# Altium PCB iman_tajik.PcbDoc
Units mm, origin at the board's own origin, x right, y up, seen from the top; angles counter-clockwise.
Board outline 105.93 x 71.25 mm, 2 copper layers (Top Layer, Bottom Layer); 28 components, 23 nets, 118 pads, 37 vias.
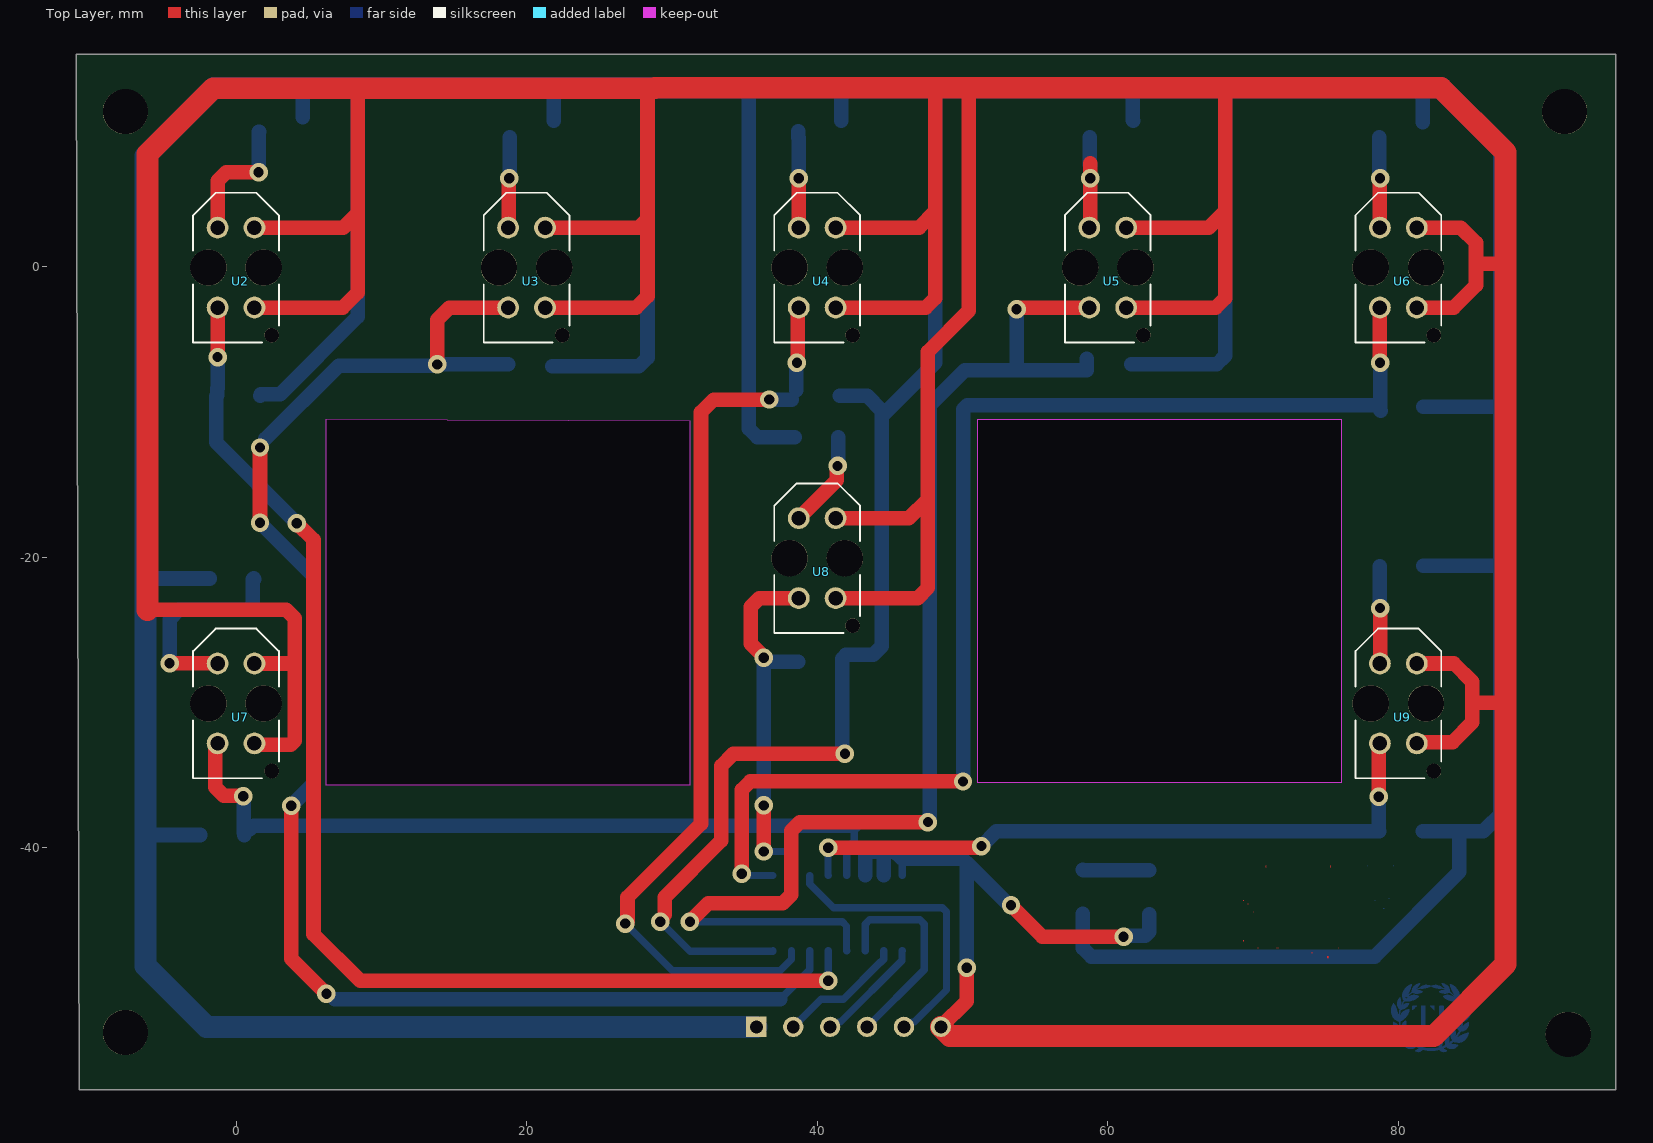
[diagram p0: Top Layer view]
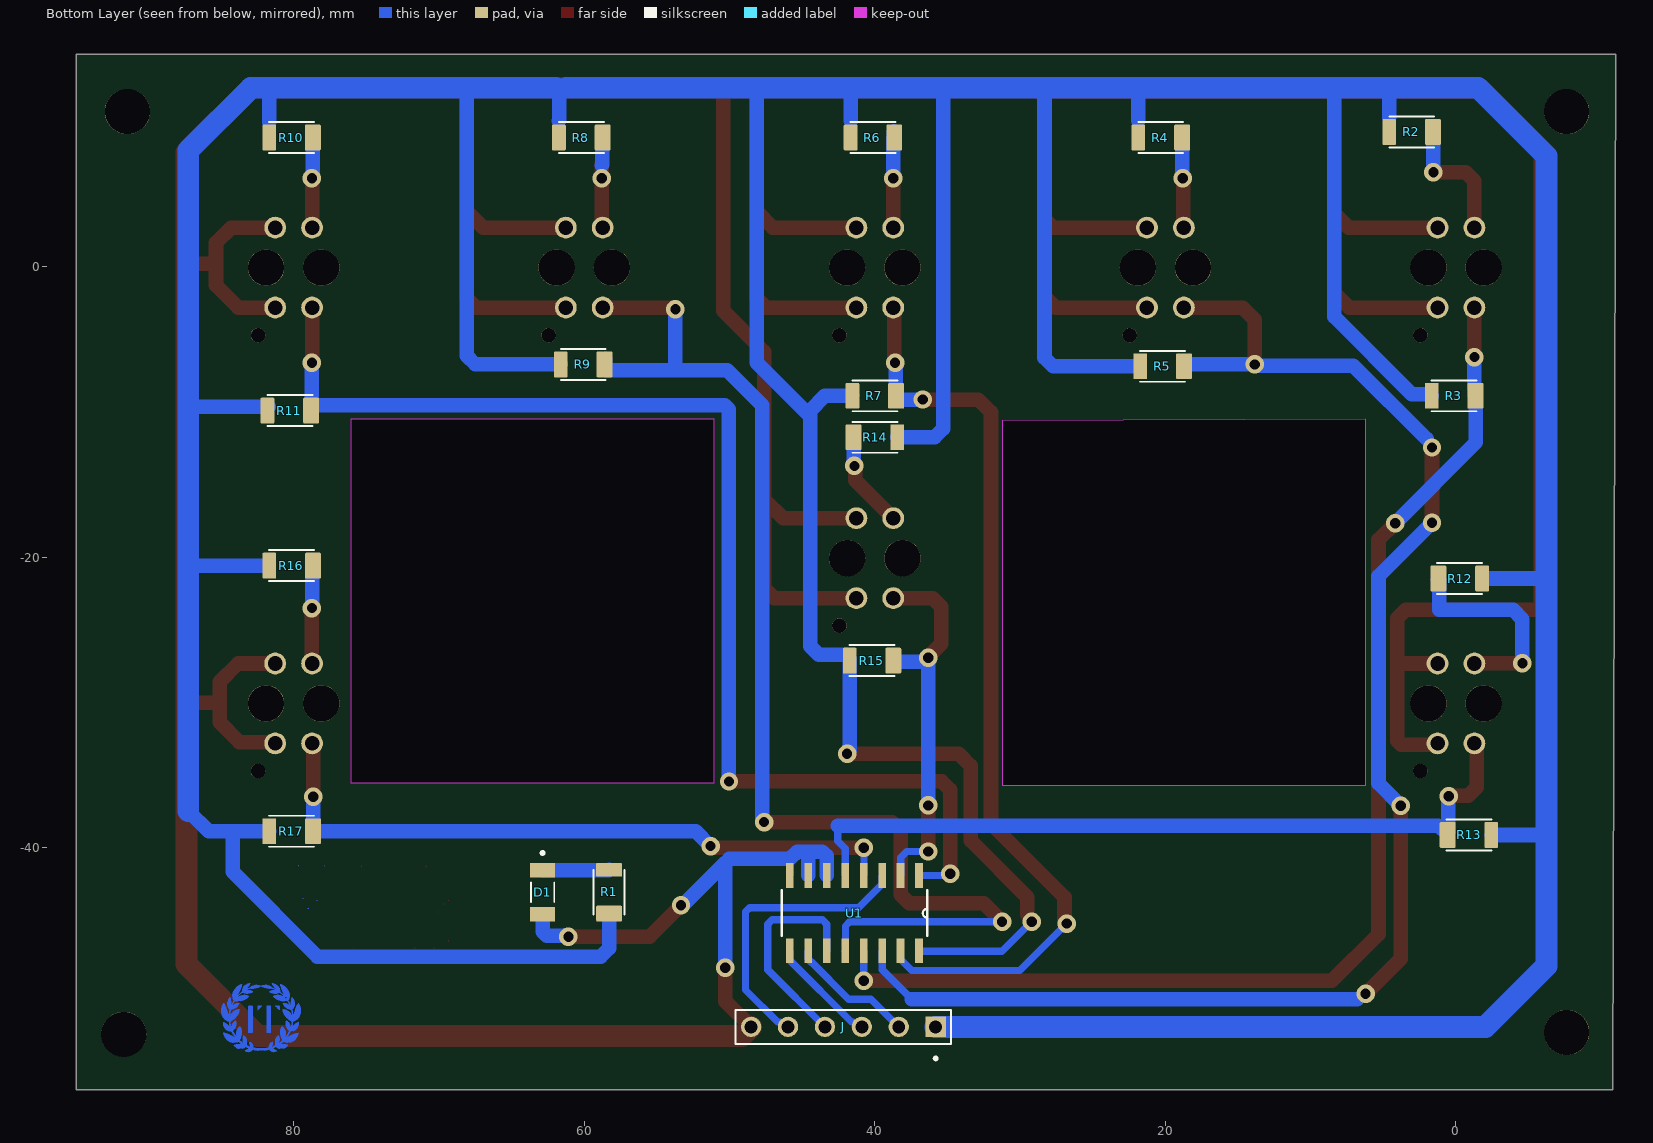
[diagram p1: Bottom Layer view, seen from below]
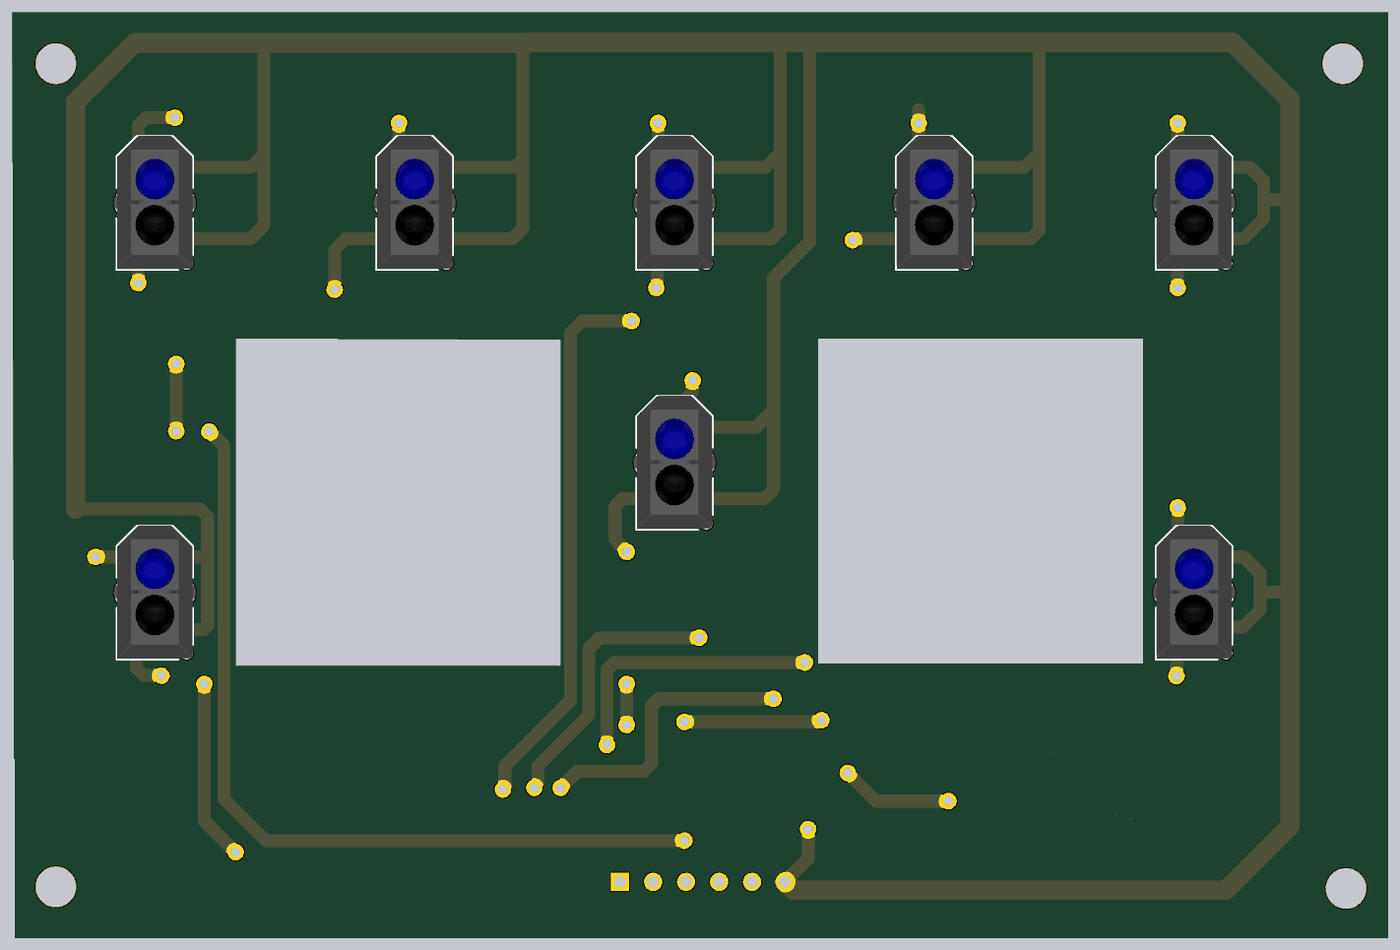
[diagram p2: 3D render of the assembled board from above, using the file's embedded part models]
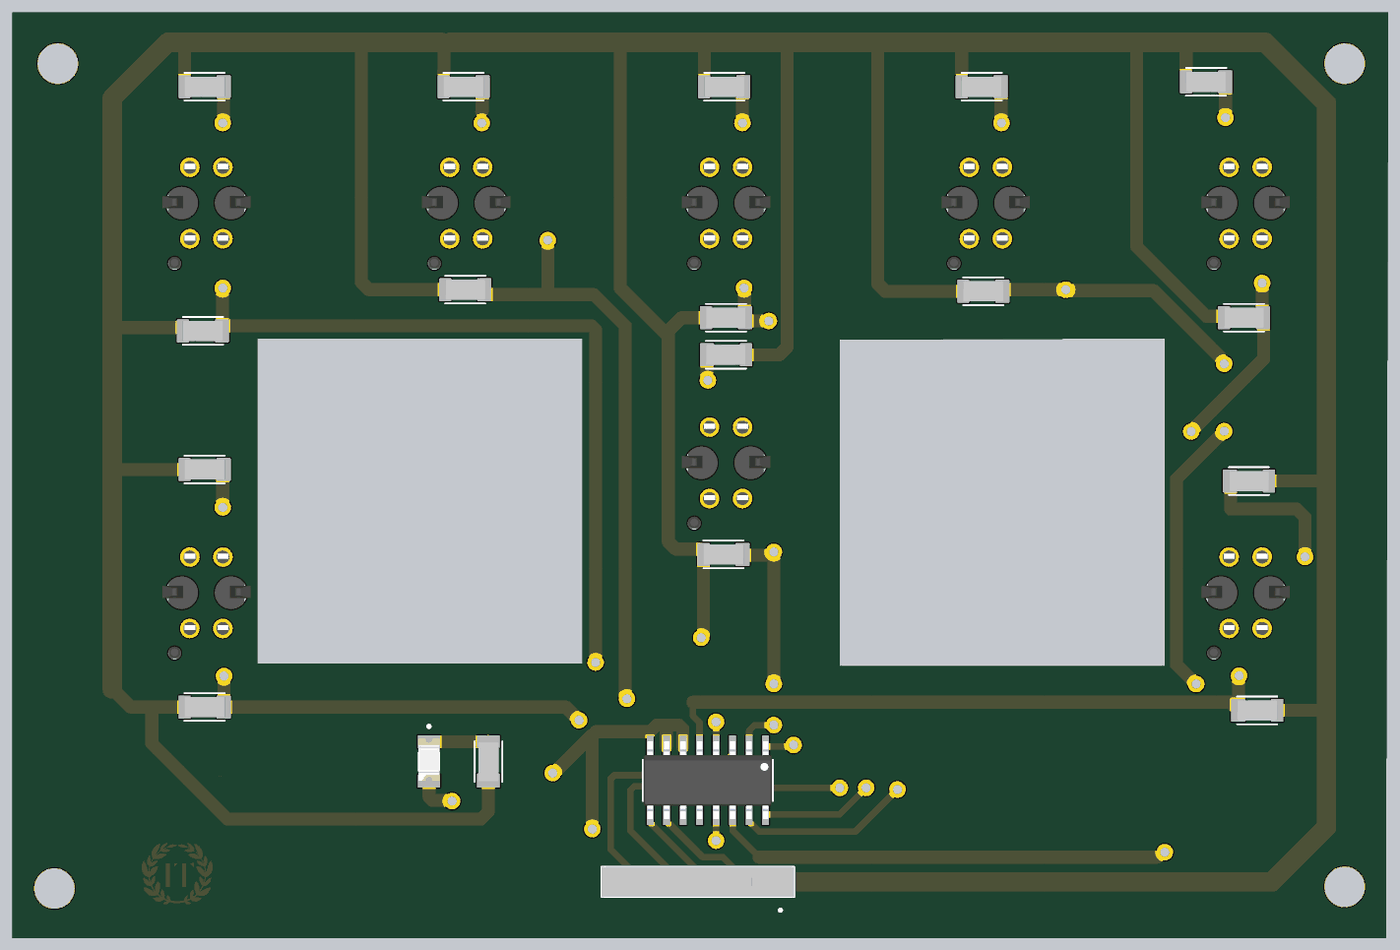
[diagram p3: 3D render of the assembled board from below, using the file's embedded part models]

## Layer stack, top to bottom
Top Solder: solder mask 0.0102, Solder Resist, Dk 3.5
Top Layer: signal copper 0.0356
Dielectric 1: dielectric 0.32, FR-4, Dk 4.8
Bottom Layer: signal copper 0.0356
Bottom Solder: solder mask 0.0102, Solder Resist, Dk 3.5

## Board outline
-10.805,-56.642 -10.981,14.605 94.948,14.605 94.948,-56.642
cut-out: 31.242,-10.593 31.242,-35.687 6.223,-35.687 6.223,-10.49
cut-out: 51.054,-35.509 51.054,-10.49 76.073,-10.49 76.073,-35.509

## Design rules (kind name [scope] priority, off if disabled: settings)
Clearance [All] p1: gap=0.254 ignorepadtopadclearanceinfootprint=FALSE except(0: Arc-Hole Track-Hole SMDPad-Hole THPad-Hole Via-Hole Fill-Hole Poly-Hole Region-Hole Text-Hole)
PolygonConnect [All] p1: connectstyle=Relief reliefconductorwidth=0.254 reliefentries=4 polygonreliefangle="90 Angle" airgapwidth=0.254
RoutingVias [All] p1: holewidth=0.711 width=1.27 viastyle="Through Hole" minholewidth=0.711 minwidth=1.27 maxholewidth=0.711 maxwidth=1.27
SolderMaskExpansion [All] p1: expansion=0.102 istentingtop=FALSE
Width [All] p1: maxlimit=1.5 minlimit=0.5 preferedwidth=1
30 further rules are at their usual default settings.

## Components (designator, comment, footprint, x,y, rotation, side; value= is the part's Value field where it differs from the comment)
D1 "LHN974_RED_LED_1206" LEDC3216X120N 62.865,-43.053 r270 bottom
J "103321-6" TE_103321-6 42.164,-52.324 r0 bottom
R1 "2-1879462-9" RESC3115X65N 58.293,-43.058 r90 bottom
R2 "2-1879462-9" RESC3115X65N 3.048,9.271 r0 bottom
R3 "2-1879462-9" RESC3115X65N 0.127,-8.89 r0 bottom
R4 "2-1879462-9" RESC3115X65N 20.32,8.89 r0 bottom
R5 "2-1879462-9" RESC3115X65N 20.193,-6.858 r0 bottom
R6 "2-1879462-9" RESC3115X65N 40.132,8.89 r0 bottom
R7 "2-1879462-9" RESC3115X65N 40,-8.89 r0 bottom
R8 "2-1879462-9" RESC3115X65N 60.198,8.89 r0 bottom
R9 "-1879462-9" RESC3115X65N 60.071,-6.731 r0 bottom
R10 "2-1879462-9" RESC3115X65N 80.137,8.89 r0 bottom
R11 "2-1879462-9" RESC3115X65N 80.264,-9.906 r0 bottom
R12 "2-1879462-9" RESC3115X65N -0.254,-21.463 r180 bottom
R13 "2-1879462-9" RESC3115X65N -0.889,-39.116 r180 bottom
R14 "2-1879462-9" RESC3115X65N 40,-11.747 r180 bottom
R15 "2-1879462-9" RESC3115X65N 40.191,-27.114 r0 bottom
R16 "2-1879462-9" RESC3115X65N 80.137,-20.574 r0 bottom
R17 "-1879462-9" RESC3115X65N 80.137,-38.862 r0 bottom
U1 "74HC4051D" SOIC127P600X175-16N 41.402,-44.501 r270 bottom
U2 "TCRT5000" OPTO_TCRT5000 0,-0.063 r90 top
U3 "TCRT5000" OPTO_TCRT5000 20,-0.063 r90 top
U4 "TCRT5000" OPTO_TCRT5000 40,-0.063 r90 top
U5 "TCRT5000" OPTO_TCRT5000 60,-0.063 r90 top
U6 "TCRT5000" OPTO_TCRT5000 80,-0.063 r90 top
U7 "TCRT5000" OPTO_TCRT5000 0,-30.063 r90 top
U8 "TCRT5000" OPTO_TCRT5000 40,-20.063 r90 top
U9 "TCRT5000" OPTO_TCRT5000 80,-30.063 r90 top

## Footprints (in the part's own frame and the unit in brackets; to place one, negate y for a bottom-side part, rotate by r counter-clockwise, add the part's x,y. Pads: shape width x height; smd on the part's side, far side on the other; paste and mask are expansions set on the pad)
LEDC3216X120N [mm]
  rect 1.01x1.73 smd: NEG(1.51,0) POS(-1.51,0)
  silkscreen extent -2.8,-0.8 0.69,0.8, body extent -1.73,-0.8 1.47,0.8, height 1.2
OPTO_TCRT5000 [mm]
  round 1.5 hole 1: A(2.75,1.27) CATH(2.75,-1.27) COLL(-2.75,1.27) E(-2.75,-1.27)
  round 1 hole 1 unplated: ""(-4.65,-2.45)
  round 2.5 hole 2.5 unplated: ""(0,1.9) ""(0,-1.9)
  silkscreen extent -5.15,-2.95 5.15,2.95, body extent -5.04,-3.4 5.16,3.4, height 7.2
RESC3115X65N [mm]
  rrect14% 1.09x1.77 smd: 1(-1.465,0)
  rrect14% 0.94x1.77 smd: 2(1.54,0)
  silkscreen extent -1.55,-1.07 1.55,1.07, body extent -1.55,-0.77 1.55,0.77, height 0.56
SOIC127P600X175-16N [mil]
  rect 67x21 smd: 1(-102,175) 2(-102,125) 3(-102,75) 4(-102,25) 5(-102,-25) 6(-102,-75) 7(-102,-125) 8(-102,-175) 9(102,-175) 10(102,-125) 11(102,-75) 12(102,-25) 13(102,25) 14(102,75) 15(102,125) 16(102,175)
  silkscreen extent -62,-197 62,197, body extent -118,-195 118,195, height 69
TE_103321-6 [mm]
  rect 1.398x1.398 hole 0.89: 1(-6.35,0)
  round 1.398 hole 0.89: 2(-3.81,0) 3(-1.27,0) 4(1.27,0) 5(3.81,0) 6(6.35,0)
  silkscreen extent -7.42,-1.17 7.42,2.27, body extent -7.42,-1.17 7.42,1.17, height 10.58

## Part data
D1: "2.6 V Red LED SMD", Package=None, Availability="Not in stock", Check_prices=https://www.snapeda.com/parts/LHN974%20RED%20LED%201206/Osram/view-part/7899607/?ref=eda, MF=Osram, MP="LHN974 RED LED 1206", Price=None, SnapEDA_Link=https://www.snapeda.com/parts/LHN974%20RED%20LED%201206/Osram/view-part/7899607/?ref=snap
J: "Pin 06 MODII HDR SRST B / A .100CL 6 POS", Package=None, Availability=Unavailable, MF="TE Connectivity", Mouser-Purchase-URL=https://snapeda.com/shop?store=Mouser&id=4238467, MP=103321-6, Price=None, SnapEDA_Link=https://www.snapeda.com/parts/103321-6/TE%20Connectivity/view-part/4238467/?ref=snap
R1 R2 R3 R4 R5 R6 R7 R8 R10 R11 R12 R13 R14 R15 R16: "RES 0.24 OHM 1% 1/4W 1206", Package=1206, Power_Rating=".25 W", Resistance=24, Tolerance=1%, Availability=Unavailable, EU_RoHS_Compliance="Compliant with Exemptions", MF="TE Connectivity", MP=2-1879462-9, Price=None, SnapEDA_Link=https://www.snapeda.com/parts/2-1879462-9/TE%20Connectivity/view-part/2213899/?ref=snap
R9 R17: library part 2-1879462-9, "RES 0.24 OHM 1% 1/4W 1206", Package=1206, Power_Rating=".25 W", Resistance=120, Tolerance=1%, Availability=Unavailable, EU_RoHS_Compliance="Compliant with Exemptions", MF="TE Connectivity", MP=2-1879462-9, Price=None, SnapEDA_Link=https://www.snapeda.com/parts/2-1879462-9/TE%20Connectivity/view-part/2213899/?ref=snap
U1: "1 Circuit IC Switch 8:1 130Ohm 16-SOIC", Package="SOIC-16 Toshiba", Availability="In Stock", Check_prices=https://www.snapeda.com/parts/74HC4051D/Toshiba/view-part/?ref=eda, MF=Toshiba, MP=74HC4051D, Price=None, Purchase-URL=https://pricing.snapeda.com/search/part/74HC4051D/?ref=eda, SnapEDA_Link=https://www.snapeda.com/parts/74HC4051D/Toshiba/view-part/?ref=snap
U2 U3 U4 U5 U6 U7 U8 U9: "950 nm 60 mA Through Hole Reflective Optical Sensor with Transistor Output", Package=None, Availability=Unavailable, MP=TCRT5000, Price=None

## Free pads (board coordinates)
  round 3.1 hole 3.1: 2(91.44,10.668) 2(91.694,-52.832) 4(-7.62,-52.705) 5(-7.62,10.668)

## Via types
v1: diameter 1.27, hole 0.711, Top Layer to Bottom Layer, 37 vias

## Nets (pads, with @x,y where several pads share a name; then routed paths per layer and width w, separated by ;. In a path a pad name is that pad's centre, name@x,y a point inside that pad or via, vN(x,y) a via of type N, cw(c..) or ccw(c..) an arc to the next point about the centre after c; other vN are vias at no path point)
+5: J.1 R1.1 R2.2 R3.2 R4.2 R5.2 R6.2 R7.2 R8.2 R9.2 R10.2 R11.2 R12.2 R13.2 R14.2 R15.2 R16.2 R17.2 U1.16 | length 497.7
  Top Layer w0.5: v1(29.21,-45.085) 29.21,-44.877 v1@29.499,-44.588
  Top Layer w1: v1@29.499,-44.588 29.499,-43.399 33.401,-39.497 33.401,-34.368 34.237,-33.532 v1(41.91,-33.532)
  Bottom Layer w0.5: v1(29.21,-45.085) 31.242,-47.117 36.94,-47.117 36.957,-47.1 U1.16 ; R15.2@41.757,-26.945 41.731,-26.919 R15.2@41.951,-26.699
  Bottom Layer w1: -6.223,-39.116 R13.2@-2.459,-39.116 ; -6.223,-21.463 R12.2 ; R3.2 1.697,-8.86 1.697,-8.777 3.034,-8.777 8.382,-3.429 8.382,12.319 ; 4.588,10.287 4.588,12.319 ; R5.2@21.763,-6.858 27.735,-6.858 28.321,-6.272 28.321,12.319 ; 21.86,10.033 21.86,12.319 ; 35.306,12.319 35.306,-11.161 35.892,-11.747 R14.2 ; R7.2 43.434,-8.89 44.45,-9.906 44.45,-26.113 43.864,-26.699 R15.2@41.951,-26.699 ; 41.672,10.033 41.672,12.319 ; R15.2@41.757,-26.945 41.731,-26.971 41.731,-33.28 41.91,-33.459 v1(41.91,-33.532) ; 44.45,-10.287 48.133,-6.604 48.133,12.319 ; R1.1 58.293,-46.912 58.879,-47.498 78.359,-47.498 84.201,-41.656 84.201,-38.862 ; 61.214,12.319 61.708,11.825 61.708,10.063 61.738,10.033 ; R9.2 67.486,-6.731 68.072,-6.145 68.072,12.319 ; R17.2 84.201,-38.862 ; 81.677,9.937 81.677,12.303 ; R16.2@81.707,-20.574 87.249,-20.574 ; R11.2@81.707,-9.652 87.249,-9.652 ; 87.249,-37.465 85.852,-38.862 84.201,-38.862
  Bottom Layer w1.5: J.1 -2.032,-52.324 -6.223,-48.133 -6.223,-39.116 -6.223,-21.463 -6.223,7.62 -1.524,12.319 4.588,12.319 8.382,12.319 21.86,12.319 28.321,12.319 35.306,12.319 41.672,12.319 48.133,12.319 61.214,12.319 ; 61.962,12.319 68.072,12.319 81.661,12.319 ; 81.677,12.303 81.661,12.319 ; 87.249,-37.465 87.249,-20.574 87.249,-9.652 87.249,8.001 82.931,12.319 81.661,12.319
GND: D1.NEG J.6 U1.6 U1.7 U1.8 U2.CATH U2.E U3.CATH U3.E U4.CATH U4.E U5.CATH U5.E U6.CATH U6.E U7.CATH U7.E U8.CATH U8.E U9.CATH U9.E | length 483
  Top Layer w1: -6.096,-23.622 3.471,-23.622 4.056,-24.208 4.056,-27.313 ; U7.E 1.366,-32.908 3.763,-32.908 4.056,-32.615 4.056,-27.313 ; U7.CATH 4.056,-27.313 ; U2.E 7.347,-2.813 8.382,-1.778 8.382,3.683 ; U2.CATH 7.386,2.687 8.382,3.683 ; 8.382,12.277 8.382,3.683 ; U3.E 27.54,-2.813 28.321,-2.032 28.321,3.302 ; U3.CATH 27.706,2.687 28.321,3.302 ; 28.321,12.277 28.321,3.302 ; U8.E 46.91,-22.813 47.625,-22.098 47.625,-16.002 ; U8.CATH 46.314,-17.313 47.625,-16.002 ; U4.E 47.479,-2.813 48.133,-2.159 48.133,3.81 ; U4.CATH 47.01,2.687 48.133,3.81 ; 48.006,12.319 48.133,12.192 48.133,3.81 ; J.6 50.292,-50.546 v1(50.292,-48.26) ; 50.419,12.319 50.419,-3.048 47.625,-5.842 47.625,-16.002 ; v1(53.34,-43.942) 55.507,-46.109 v1(61.087,-46.109) ; U5.E 67.418,-2.813 68.072,-2.159 68.072,3.81 ; U5.CATH 66.949,2.687 68.072,3.81 ; 68.199,12.319 68.072,12.192 68.072,3.81 ; U9.E 81.366,-32.717 83.742,-32.717 85.09,-31.369 85.09,-30.015 ; U9.CATH 83.828,-27.313 85.09,-28.575 85.09,-30.015 ; U6.E 83.801,-2.813 85.344,-1.27 85.344,0.191 ; U6.CATH 84.308,2.687 85.344,1.651 85.344,0.191 ; 87.376,-30.015 85.09,-30.015 ; 87.376,0.254 87.313,0.191 85.344,0.191
  Top Layer w1.5: -6.096,-23.622 -6.096,7.747 -1.566,12.277 8.382,12.277 28.321,12.277 28.829,12.277 ; 28.829,12.319 48.006,12.319 50.419,12.319 68.199,12.319 82.931,12.319 87.376,7.874 87.376,0.254 87.376,-30.015 87.376,-48.006 82.423,-52.959 49.149,-52.959 J.6
  Bottom Layer w0.5: U1.6 U1.6@43.324,-41.893 ; U1.7 U1.7@44.594,-41.893 ; 44.594,-40.369 44.704,-40.259 ; U1.8 45.847,-40.759 ; 50.03,-40.759 50.292,-41.021 ; v1@53.213,-43.942 v1(53.34,-43.942) ; v1(61.087,-46.109) v1@61.139,-46.057
  Bottom Layer w1: U1.6@43.324,-41.893 43.324,-41.129 43.324,-40.552 43.617,-40.259 44.704,-40.259 45.347,-40.259 45.847,-40.759 50.03,-40.759 ; U1.7@44.594,-41.893 44.594,-40.369 ; v1(50.292,-48.26) 50.292,-41.021 v1@53.213,-43.942 ; v1@61.139,-46.057 62.572,-46.057 62.865,-45.764 D1.NEG
NetD1_POS: D1.POS R1.2 | length 4.6
  Bottom Layer w1: R1.2 58.313,-41.538 62.86,-41.538 D1.POS
NetR2_1: R2.1 U2.A | length 9.1
  Top Layer w1: U2.A -1.27,5.921 -0.684,6.506 v1(1.553,6.506)
  Bottom Layer w1: v1(1.553,6.506) 1.553,9.241 R2.1
NetR4_1: R4.1 U3.A | length 6.2
  Top Layer w1: U3.A 18.763,2.72 v1@18.763,6.096
  Bottom Layer w1: v1@18.826,6.096 18.826,8.861 R4.1
  other v1: 18.796,6.096
NetR6_1: R6.1 U4.A | length 6.6
  Top Layer w1: U4.A 38.733,2.69 v1@38.733,6.096
  Bottom Layer w1: R6.1@38.712,9.31 38.712,8.89 38.735,8.867 v1(38.735,6.096)
NetR8_1: R8.1 U5.A | length 6.4
  Top Layer w1: U5.A 58.801,2.758 58.801,7.112
  Bottom Layer w1: R8.1@58.767,8.89 58.767,7.019 58.801,6.985
  other v1: 58.801,6.096
NetR10_1: R10.1 U6.A | length 6.2
  Top Layer w1: U6.A 78.735,2.692 78.735,6.091 v1(78.74,6.096)
  Bottom Layer w1: v1@78.672,6.164 78.688,6.18 78.688,6.221 78.672,6.237 R10.1
NetR12_1: R12.1 U7.A | length 14.6
  Top Layer w1: v1(-4.572,-27.305) -4.568,-27.309 -1.274,-27.309 U7.A
  Bottom Layer w1: v1(-4.572,-27.305) -4.572,-24.257 -3.937,-23.622 1.143,-23.622 1.143,-22.209 1.166,-22.186 1.166,-21.508 R12.1 R12.1@1.256,-21.508
NetR14_1: R14.1 U8.A | length 6.7
  Top Layer w1: U8.A 41.355,-14.688 41.355,-13.763 v1(41.402,-13.716)
  Bottom Layer w1: v1(41.402,-13.716) 41.402,-13.643 41.465,-13.58 R14.1
NetR16_1: R16.1 U9.A | length 6.8
  Top Layer w1: U9.A 78.764,-27.278 78.764,-23.519 v1(78.74,-23.495)
  Bottom Layer w0.5: R16.1 R16.1@78.735,-20.637
  Bottom Layer w1: R16.1@78.717,-20.637 78.717,-21.297 78.735,-21.315 78.735,-23.37 78.74,-23.375 v1(78.74,-23.495)
OUT: J.5 U1.3 | length 20.1
  Bottom Layer w0.5: U1.3 39.497,-42.494 41.118,-44.115 48.602,-44.115 48.895,-44.408 48.895,-49.784 46.689,-51.99 46.551,-51.99 46.217,-52.324 J.5
S0: J.4 U1.11 | length 14.9
  Bottom Layer w0.5: U1.11 43.307,-45.251 43.6,-44.958 47.078,-44.958 47.371,-45.251 47.371,-48.387 J.4
S1: J.2 U1.10 | length 8.7
  Bottom Layer w0.5: J.2 40.259,-50.419 41.81,-50.419 44.35,-47.879 44.374,-47.879 44.577,-47.676 U1.10
S2: J.3 U1.9 | length 7.5
  Bottom Layer w0.5: J.3 41.137,-52.324 41.471,-51.99 41.609,-51.99 45.83,-47.769 45.83,-47.108 U1.9
Y1: R3.1 U1.13 U2.COLL | length 84.8
  Top Layer w1: v1(-1.27,-6.223) U2.COLL ; v1(4.191,-17.653) 5.334,-18.796 5.334,-45.935 8.548,-49.149 v1(40.767,-49.149)
  Bottom Layer w0.5: U2.COLL@-1.304,-2.847 U2.COLL ; v1(40.767,-49.149) U1.13
  Bottom Layer w1: v1(-1.27,-6.223) -1.27,-8.358 -1.293,-8.381 -1.293,-8.845 -1.376,-8.928 -1.376,-12.086 v1(4.191,-17.653)
Y2: R5.1 U1.14 U3.COLL | length 104.2
  Top Layer w1: v1(1.651,-17.63) v1(1.651,-12.446) ; v1(3.81,-37.092) 3.81,-47.625 v1(6.223,-50.038) ; v1(13.843,-6.731) 13.843,-3.655 14.683,-2.815 U3.COLL@18.728,-2.815
  Bottom Layer w0.5: v1(1.651,-12.446) 1.651,-12.238 2.023,-11.866 2.023,-11.859 ; v1(6.223,-50.038) 6.431,-50.038 6.812,-50.419 ; v1@13.759,-6.815 v1(13.843,-6.731) ; 37.465,-50.419 39.497,-48.387 U1.14
  Bottom Layer w1: v1(1.651,-17.63) 5.334,-21.313 5.334,-35.568 v1(3.81,-37.092) ; 2.023,-11.859 7.067,-6.815 v1@13.759,-6.815 ; 6.812,-50.419 37.465,-50.419 ; v1(13.843,-6.731) R5.1@18.728,-6.731
Y3: R7.1 U1.15 U4.COLL | length 64.1
  Top Layer w0.5: v1(26.797,-45.212) v1@26.944,-45.065
  Top Layer w1: v1@26.944,-45.065 26.944,-44.43 26.944,-43.414 32.004,-38.354 32.004,-10.033 32.893,-9.144 v1(36.703,-9.144) ; v1(38.608,-6.604) 38.66,-6.552 38.66,-2.883 U4.COLL
  Bottom Layer w0.5: v1(26.797,-45.212) 30.031,-48.446 37.456,-48.446 38.227,-47.676 U1.15 ; R7.1@38.24,-9.144 38.571,-8.812 R7.1@38.571,-8.513
  Bottom Layer w1: v1(36.703,-9.144) R7.1@38.24,-9.144 ; R7.1@38.571,-8.513 38.571,-6.64 v1(38.608,-6.604)
Y4: R9.1 U1.12 U5.COLL | length 85
  Top Layer w1: v1(31.242,-45.085) 32.512,-43.815 37.641,-43.815 38.227,-43.229 38.227,-38.813 38.813,-38.227 v1@47.582,-38.227 ; v1(53.721,-2.921) 53.794,-2.921 53.902,-2.813 U5.COLL
  Bottom Layer w0.5: v1(31.242,-45.085) 41.727,-45.085 42.02,-45.378 42.02,-47.075 U1.12 ; v1(47.625,-38.227) v1@47.759,-38.093 ; 47.752,-37.127 47.759,-37.135
  Bottom Layer w1: 47.752,-37.127 47.752,-9.525 50.161,-7.116 53.975,-7.116 58.561,-7.116 R9.1@58.561,-6.346 ; v1@47.759,-38.093 47.759,-37.135 ; 53.721,-7.116 v1(53.721,-2.921)
Y5: R11.1 U1.1 U6.COLL | length 85.2
  Top Layer w1: v1(34.798,-41.783) 34.798,-36.019 35.384,-35.433 v1@49.965,-35.433 ; U6.COLL 78.73,-6.594 v1(78.74,-6.604)
  Bottom Layer w0.5: v1(34.798,-41.783) 34.925,-41.91 U1.1 ; R11.1@78.504,-9.525 78.799,-9.82 R11.1
  Bottom Layer w1: v1(50.038,-35.433) 50.038,-9.818 50.331,-9.525 R11.1@78.504,-9.525 ; v1(78.74,-6.604) 78.769,-6.633 78.769,-9.876 R11.1
Y6: R13.1 U1.5 U7.COLL | length 54
  Top Layer w0.5: U7.COLL@-1.431,-32.974 U7.COLL
  Top Layer w1: U7.COLL@-1.431,-32.974 -1.366,-33.04 -1.366,-33.262 -1.431,-33.328 -1.431,-35.84 -0.845,-36.426 0.485,-36.426 v1(0.508,-36.449)
  Bottom Layer w0.5: U1.5 42.037,-40.044 42.545,-39.536 42.545,-38.481
  Bottom Layer w1: v1(0.508,-36.449) 0.542,-36.483 0.542,-38.944 R13.1@0.576,-38.978 ; R13.1 R13.1@0.576,-38.978 ; R13.1@0.606,-39.007 R13.1@0.576,-38.978 ; 42.545,-38.481 1.211,-38.481 0.961,-38.731 0.621,-38.731 0.576,-38.776 R13.1@0.576,-38.978
Y7: R15.1 U1.2 U8.COLL | length 26.6
  Top Layer w0.5: v1(36.319,-40.252) v1@36.322,-40.248
  Top Layer w1: v1@36.322,-40.248 v1(36.322,-37.084) ; v1(36.322,-26.924) 36.322,-26.851 35.433,-25.962 35.433,-23.399 36.019,-22.813 U8.COLL
  Bottom Layer w0.5: v1(36.319,-40.252) 36.326,-40.259 37.802,-40.259 38.21,-40.667 38.21,-41.893 U1.2 ; R15.1@38.658,-27.182 R15.1
  Bottom Layer w1: v1(36.322,-37.084) v1(36.322,-26.924) 36.395,-26.924 36.653,-27.182 R15.1@38.681,-27.182
Y8: R17.1 U1.4 U9.COLL | length 46.4
  Top Layer w0.5: v1(40.767,-40.005) v1@40.771,-40.001 ; v1@51.185,-40.001 v1(51.308,-39.878)
  Top Layer w1: v1@40.771,-40.001 v1@51.185,-40.001 ; v1(78.642,-36.478) 78.665,-36.456 78.665,-32.878 U9.COLL
  Bottom Layer w0.5: U1.4 40.75,-41.893 40.75,-40.022 v1(40.767,-40.005) ; R17.1@78.642,-38.833 R17.1
  Bottom Layer w1: v1(51.308,-39.878) 52.324,-38.862 R17.1 ; R17.1@78.642,-38.833 v1(78.642,-36.478)
pads on no net: U2. U3. U4. U5. U6. U7. U8. U9.

## Other copper
Top Layer:
  region: 75.581,-46.111 75.582,-46.109 75.584,-46.111 75.582,-46.113
  region: 71.627,-46.891 71.634,-46.895 71.632,-46.901 71.623,-46.903 71.619,-46.895 71.625,-46.889
  region: 69.392,-46.428 69.386,-46.426 69.388,-46.421 69.396,-46.425 69.398,-46.426 69.396,-46.428
  region: 69.129,-42.392 69.125,-42.4 69.116,-42.401 69.11,-42.392 69.116,-42.386 69.129,-42.388
  region: 75.863,-46.889 75.878,-46.893 75.88,-46.899 75.874,-46.905 75.861,-46.903 75.861,-46.891
  region: 70.904,-41.27 70.891,-41.276 70.881,-41.266 70.877,-41.251 70.883,-41.241 70.895,-41.237 70.908,-41.247 70.904,-41.266
  region: 75.308,-41.243 75.323,-41.239 75.335,-41.247 75.331,-41.266 75.321,-41.276 75.313,-41.272 75.308,-41.266 75.304,-41.251 75.306,-41.245
  region: 69.346,-43.604 69.352,-43.606 69.354,-43.616 69.344,-43.629 69.342,-43.631 69.333,-43.625 69.331,-43.612 69.335,-43.604 69.342,-43.604
  region: 71.713,-47.085 71.715,-47.095 71.705,-47.097 71.7,-47.091 71.709,-47.082 71.711,-47.084
  region: 68.601,-44.961 68.593,-44.957 68.591,-44.943 68.601,-44.934 68.612,-44.937 68.618,-44.943 68.614,-44.959 68.605,-44.961
  region: 68.656,-44.947 68.66,-44.951 68.651,-44.957 68.649,-44.943 68.651,-44.941 68.654,-44.945
  region: 70.345,-46.886 70.355,-46.891 70.351,-46.907 70.341,-46.909 70.332,-46.903 70.334,-46.889 70.341,-46.886
  region: 70.706,-46.113 70.704,-46.111 70.706,-46.109 70.708,-46.111
  region: 69.344,-46.38 69.338,-46.382 69.337,-46.373 69.346,-46.371 69.348,-46.377 69.346,-46.378
  region: 70.891,-41.349 70.883,-41.345 70.881,-41.335 70.891,-41.318 70.898,-41.322 70.904,-41.327 70.9,-41.347 70.895,-41.349
  region: 75.331,-41.339 75.327,-41.347 75.317,-41.349 75.308,-41.339 75.319,-41.32 75.321,-41.318 75.327,-41.324 75.331,-41.335
  region: 75.192,-47.468 75.196,-47.483 75.192,-47.522 75.196,-47.579 75.187,-47.589 75.131,-47.587 75.125,-47.589 75.098,-47.573 75.096,-47.568 75.112,-47.545 75.116,-47.529 75.112,-47.518 75.108,-47.491 75.104,-47.479 75.118,-47.466 75.148,-47.47 75.152,-47.47 75.179,-47.458 hole: 75.144,-47.531 75.143,-47.537 75.144,-47.539 75.146,-47.537 75.146,-47.533
  region: 74.076,-47.258 74.065,-47.262 74.049,-47.258 74.044,-47.253 74.04,-47.237 74.044,-47.203 74.04,-47.191 74.045,-47.185 74.065,-47.178 74.08,-47.182 74.086,-47.187 74.088,-47.251 74.08,-47.258
  region: 70.049,-44.415 70.061,-44.419 70.063,-44.432 70.057,-44.438 70.049,-44.434 70.044,-44.428 70.047,-44.417
  region: 71.717,-46.889 71.719,-46.907 71.705,-46.913 71.696,-46.903 71.694,-46.893 71.702,-46.886 71.715,-46.888
  region: 69.654,-43.889 69.642,-43.892 69.627,-43.889 69.621,-43.883 69.625,-43.864 69.642,-43.858 69.655,-43.864 69.659,-43.879 69.655,-43.887
  region: 69.338,-46.409 69.35,-46.413 69.356,-46.419 69.352,-46.434 69.335,-46.436 69.329,-46.43 69.333,-46.415 69.337,-46.411
  region: 74.507,-47.085 74.512,-47.091 74.507,-47.097 74.499,-47.093 74.497,-47.091 74.503,-47.082 74.505,-47.084
Bottom Layer:
  region: 2974 vertices and 3 holes, not listed, extent 79.505,-54.055 84.982,-49.318
  region: 80.969,-51.045 80.972,-51.151 80.977,-51.156 80.991,-51.16 81.01,-51.148 81.013,-51.141 81.029,-51.122 81.063,-51.088 81.07,-51.084 81.082,-51.072 81.085,-51.065 81.09,-51.06 81.097,-51.057 81.12,-51.035 81.123,-51.028 81.135,-51.019 81.224,-50.93 81.231,-50.927 81.238,-50.92 81.244,-50.917 81.253,-50.901 81.25,-50.884 81.244,-50.879 81.003,-50.877 80.986,-50.881 80.976,-50.888 80.969,-50.905 80.969,-51.042
  region: 81.866,-51.045 81.864,-50.944 81.866,-50.901 81.855,-50.884 81.85,-50.879 81.826,-50.876 81.816,-50.879 81.58,-50.882 81.568,-50.894 81.566,-50.92 81.57,-52.703 81.58,-52.72 81.604,-52.724 81.816,-52.72 81.826,-52.724 81.85,-52.72 81.859,-52.712 81.862,-52.698 81.866,-52.664 81.864,-52.361 81.866,-52.27 81.862,-52.26 81.866,-52.202 81.862,-52.192 81.866,-52.116 81.864,-51.803 81.866,-51.048
  region: 82.427,-51.131 82.463,-51.166 82.48,-51.163 82.485,-51.148 82.482,-50.891 82.473,-50.882 82.46,-50.879 82.199,-50.882 82.194,-50.898 82.198,-50.908 82.21,-50.92 82.217,-50.923 82.244,-50.951 82.251,-50.954 82.256,-50.959 82.259,-50.966 82.278,-50.985 82.285,-50.988 82.294,-50.997 82.297,-51.004 82.306,-51.012 82.312,-51.016 82.324,-51.028 82.328,-51.035 82.34,-51.047 82.347,-51.05 82.365,-51.069 82.367,-51.074 82.374,-51.077 82.425,-51.129
  region: 82.821,-52.287 82.824,-52.708 82.833,-52.717 82.846,-52.72 83.091,-52.722 83.108,-52.715 83.115,-52.698 83.118,-52.647 83.115,-52.637 83.118,-52.572 83.117,-52.351 83.118,-52.284 83.115,-52.274 83.117,-52.21 83.115,-52.154 83.118,-52.144 83.117,-51.789 83.118,-50.966 83.115,-50.956 83.118,-50.905 83.108,-50.888 83.1,-50.879 82.836,-50.882 82.824,-50.891 82.817,-50.918 82.821,-50.932 82.821,-52.284
  region: 77.407,-41.426 77.405,-41.424 77.401,-41.423 77.396,-41.426 77.398,-41.432 77.4,-41.434 77.406,-41.432 77.407,-41.427
  region: 78.995,-44.15 78.987,-44.15 78.982,-44.149 78.965,-44.15 78.961,-44.154 78.963,-44.162 78.966,-44.17 78.964,-44.187 78.963,-44.193 78.968,-44.198 78.989,-44.196 78.993,-44.195 79.007,-44.201 79.009,-44.201 79.011,-44.197 79.014,-44.19 79.012,-44.179 79.014,-44.16 79.014,-44.159 79.012,-44.15 79.005,-44.147 hole: 78.99,-44.167 78.995,-44.168 78.994,-44.173 78.99,-44.174 78.988,-44.171 78.989,-44.168
  region: 78.859,-44.17 78.858,-44.167 78.854,-44.166 78.852,-44.171 78.854,-44.175 78.859,-44.174 78.859,-44.171
  region: 79.341,-43.486 79.34,-43.493 79.345,-43.495 79.349,-43.491 79.35,-43.488 79.347,-43.484 79.341,-43.485
  region: 78.862,-44.205 78.859,-44.197 78.854,-44.197 78.852,-44.199 78.85,-44.205 78.854,-44.209 78.86,-44.208 78.862,-44.206
  region: 79.557,-41.623 79.558,-41.619 79.554,-41.615 79.548,-41.617 79.547,-41.624 79.551,-41.627 79.556,-41.625 79.556,-41.624
  region: 78.392,-43.634 78.397,-43.636 78.403,-43.634 78.405,-43.632 78.407,-43.626 78.405,-43.612 78.407,-43.607 78.404,-43.605 78.397,-43.602 78.39,-43.603 78.388,-43.606 78.387,-43.631 78.39,-43.634
  region: 77.449,-41.431 77.45,-41.431 77.452,-41.429 77.451,-41.425 77.446,-41.426 77.447,-41.43 77.448,-41.43
  region: 77.888,-41.254 77.889,-41.257 77.893,-41.258 77.897,-41.254 77.892,-41.247 77.891,-41.246 77.889,-41.248 77.888,-41.253
  region: 79.673,-41.258 79.676,-41.257 79.677,-41.253 79.673,-41.246 79.67,-41.247 79.667,-41.25 79.669,-41.257 79.671,-41.258
  region: 79.342,-43.565 79.341,-43.569 79.345,-43.569 79.348,-43.567 79.344,-43.563 79.343,-43.564
  region: 77.897,-41.216 77.891,-41.214 77.886,-41.217 77.888,-41.225 77.891,-41.229 77.895,-41.227 77.897,-41.225 77.898,-41.219 77.898,-41.217
  region: 79.667,-41.227 79.673,-41.229 79.677,-41.225 79.678,-41.219 79.676,-41.215 79.671,-41.213 79.666,-41.217 79.667,-41.225
  region: 79.556,-41.656 79.558,-41.651 79.552,-41.646 79.549,-41.648 79.547,-41.65 79.548,-41.657 79.552,-41.658 79.555,-41.657
  region: 77.723,-41.383 77.722,-41.384 77.723,-41.385 77.724,-41.384
  region: 79.377,-43.487 79.374,-43.488 79.375,-43.491 79.378,-43.491 79.38,-43.488 79.378,-43.486

## Silkscreen, mask and mechanical layers (free items; w line width, h text height)
Mechanical 1:
  the board outline again, w0.5